# EAGLE board outerdim (EAGLE 9.6.2)
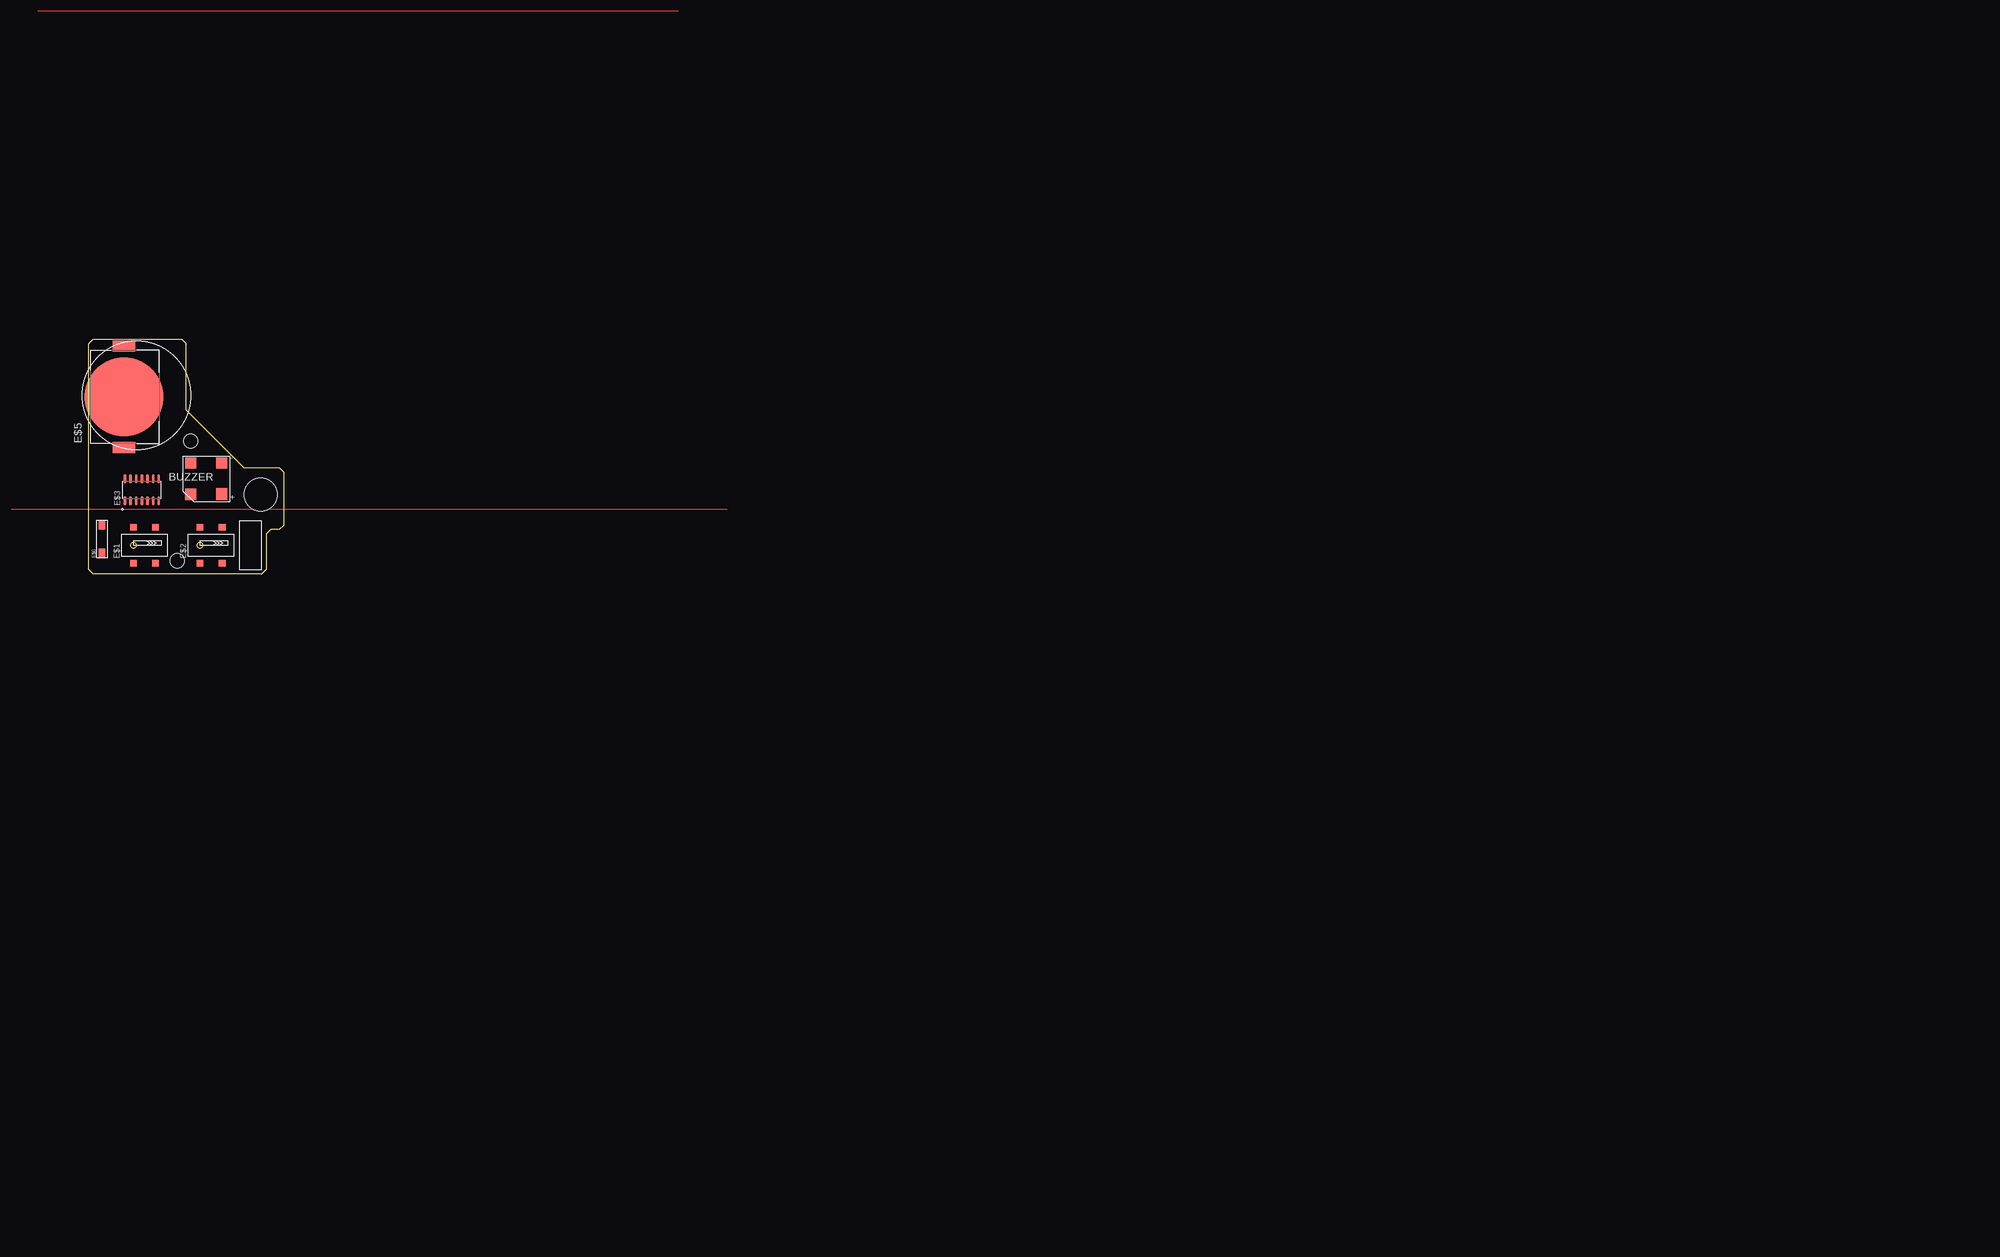
[diagram p0: board, top side]
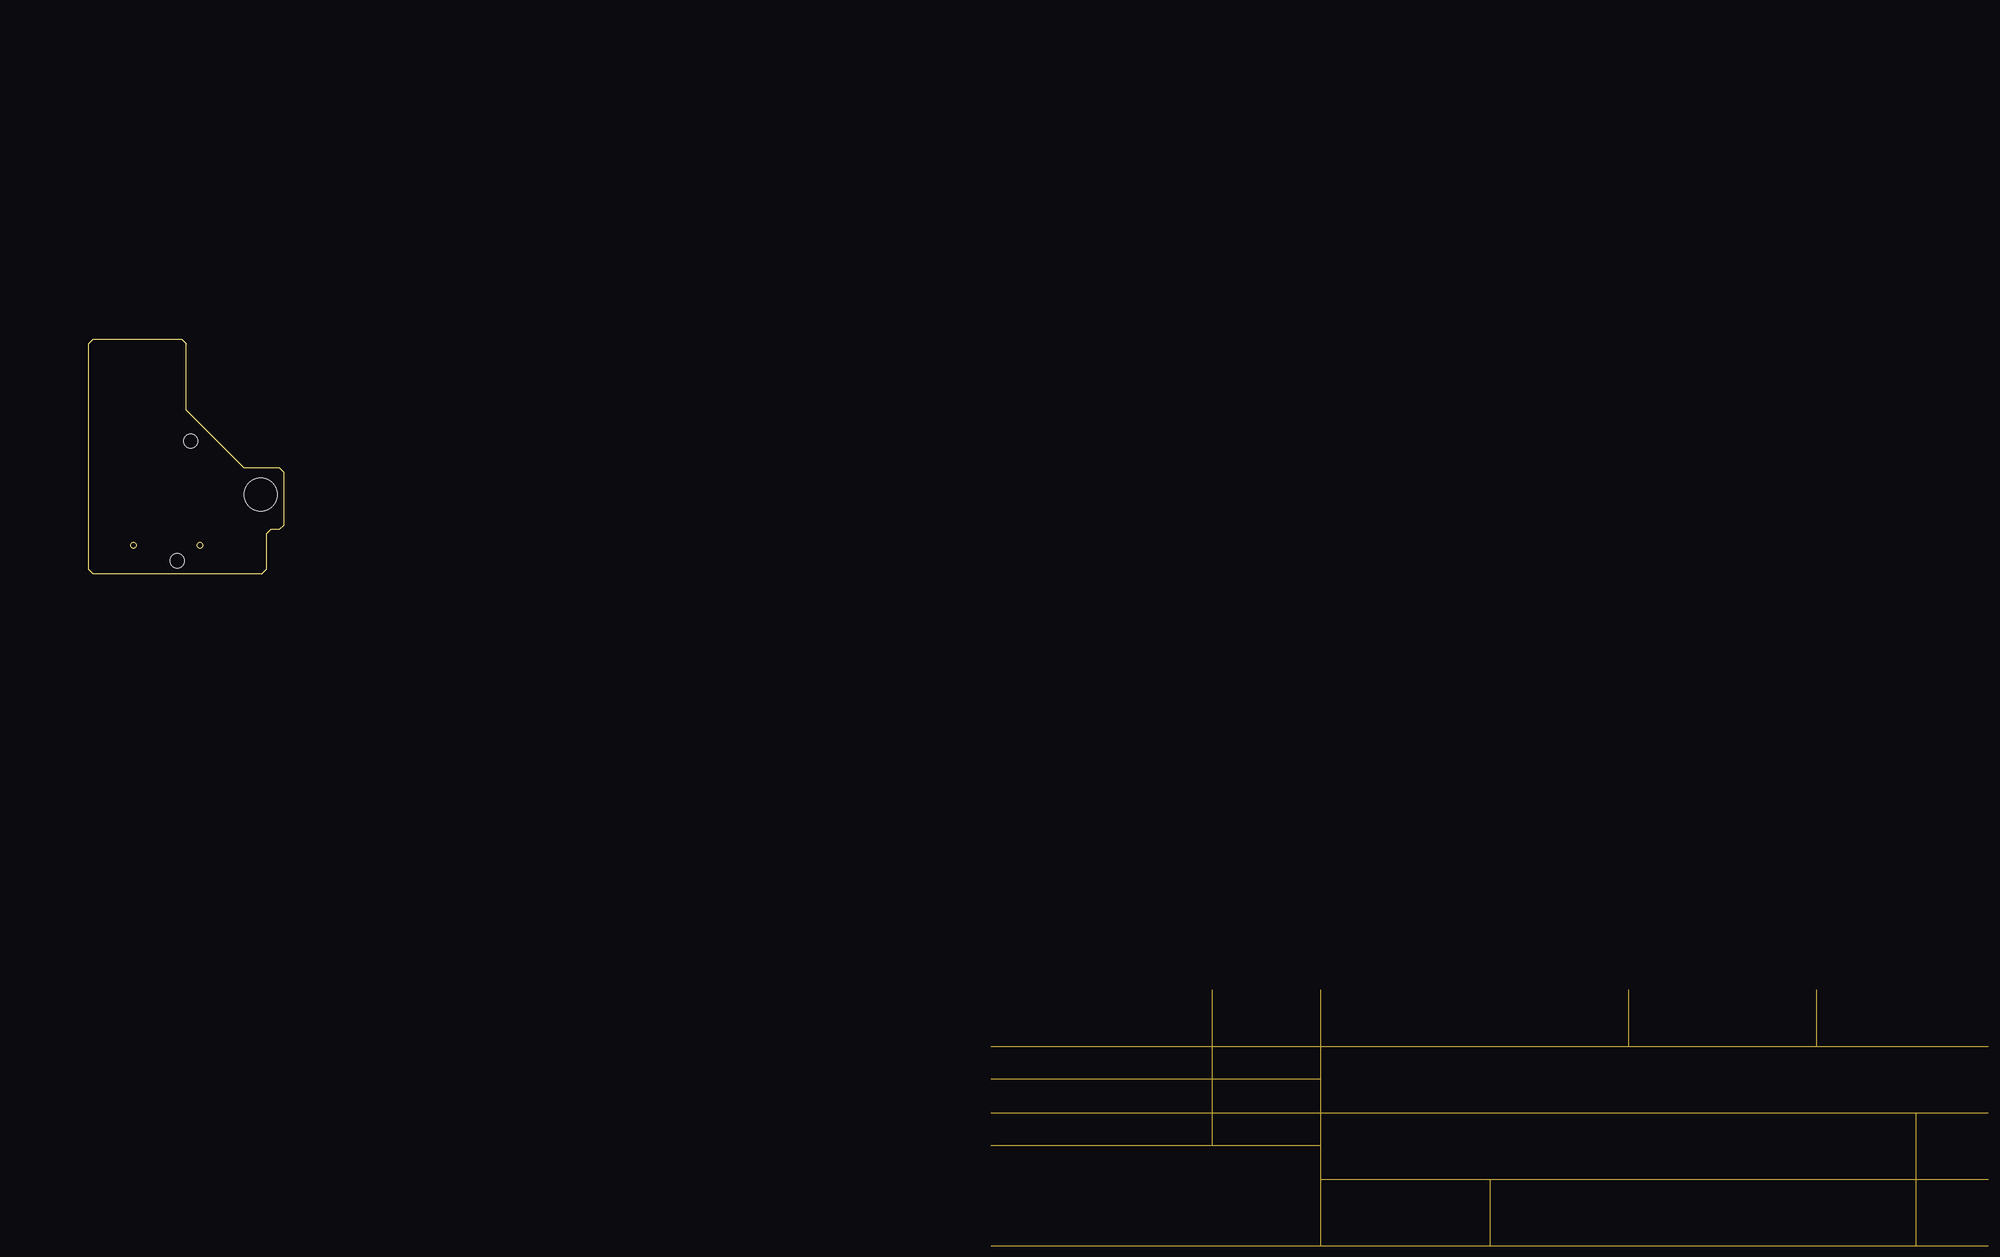
[diagram p1: board, inner layer Route5]

Size 44 x 53 mm. Coordinates in mm from the lower left corner, seen from the top.
Outline: 1,53 21,53 22,52 22,37 35,24 43,24 44,23 44,11 43,10 41,10 40,9 40,1 39,0 1,0 0,1 0,52 1,53
Copper layers (1*16): Top 0.035mm / dielectric 1.5mm / Bottom 0.035mm
Design rules "default": minimum track width 6mil, minimum drill 0.35mm, track to track 6mil, track to pad 6mil, pad to pad 6mil, via to via 6mil, smd to smd 6mil, copper to edge 40mil, drill to drill 6mil, minimum pad ring 10mil, minimum via ring 8mil, stop-mask expansion 4mil, vias tented up to drill 0mil, thermal gap 10mil
Holes 7.5 mm at 38.8,17.97
Holes 3.25 mm at 23,30 20,3

## Footprints (pad centres in the part's own frame; a part is rotated, then mirrored left to right if it is on the bottom)
MPUCX_MYV = smd 1.5 x 1.5: 1 0.1,1.55; 2 0.1,-6.55; 3 5.1,1.55; 4 5.1,-6.55
SOIC127P600X175-14N = smd 1.95 x 0.59: 1 -2.48,3.81; 2 -2.48,2.54; 3 -2.48,1.27; 4 -2.48,0; 5 -2.48,-1.27; 6 -2.48,-2.54; 7 -2.48,-3.81; 8 2.48,-3.81; 9 2.48,-2.54; 10 2.48,-1.27; 11 2.48,0; 12 2.48,1.27; 13 2.48,2.54; 14 2.48,3.81
ST-A03BH_MYV = smd 2.5 x 2.5: P$1 0,0; P$2 7,0; P$3 0,7; P$4 7,7
BAT_BAT-HLD-001 = smd 17.8 x 17.8: N1 0,0 | smd 2.5 x 5.1: P1 -11.45,0; P2 11.45,0
RI80SMDM-0510-J1 = smd 2.1 x 1.45: P$1 -3,0; P$2 3.35,0

## Placement (x,y rotation side)
E$1  [MPUCX_MYV]  10,9 0 top
E$2  [MPUCX_MYV]  25,9 0 top
E$3  [SOIC127P600X175-14N]  12,19 90 top
E$4  [ST-A03BH_MYV]  23,18 0 top
E$5  [BAT_BAT-HLD-001]  8,40 90 top
E$6  [RI80SMDM-0510-J1]  3.02,7.76 90 top

## Library data of the parts
E$1 E$2 = shouhan_BP
E$3 = ATTINY1614-SSNR
E$4 = ST-A03BH
E$5 = BAT-HLD-001
E$6 = reed_MYV

## Tracks (layer width: path | path; a pad name or v marks a point on that pad's centre or on a via)
S$1
  Route5 0.001: 412.25,-151.5 412.25,-121.5
S$2
  Route5 0.001: 203.5,-121.5 428.5,-121.5
S$3
  Route5 0.001: 277.88,-129 253.5,-129 | 253.5,-129 203.5,-129 | 253.5,-129 253.5,-93.79
S$4
  Route5 0.001: 316,-136.5 316,-151.5
S$5
  Route5 0.001: 277.88,-93.79 277.88,-114 | 277.88,-114 277.88,-136.5 | 277.88,-136.5 277.88,-151.5 | 277.88,-114 203.5,-114 | 277.88,-136.5 428.5,-136.5
S$6
  Route5 0.001: 347.25,-93.79 347.25,-106.5
S$7
  Route5 0.001: 203.5,-106.5 389.75,-106.5 | 389.75,-106.5 428.5,-106.5 | 389.75,-106.5 389.75,-93.79
S$8
  Route5 0.001: 347.25,-151.5
S$9
  Route5 0.001: 203.5,-151.5 428.5,-151.5
S$10
  Top 0.001: 144,14.5 -17.5,14.5
S$11
  Top 0.001: 133,127 -11.5,127

## Text on the board
tPlace: BUZZER